# Altium PCB diff_demo.PcbDoc
Units mm, origin at the board's own origin, x right, y up, seen from the top; angles counter-clockwise.
Board outline 152.4 x 101.6 mm, 4 copper layers (Top Layer, PWR, GND, Bottom Layer); 7 components, 8 nets, 41 pads, 2 vias.
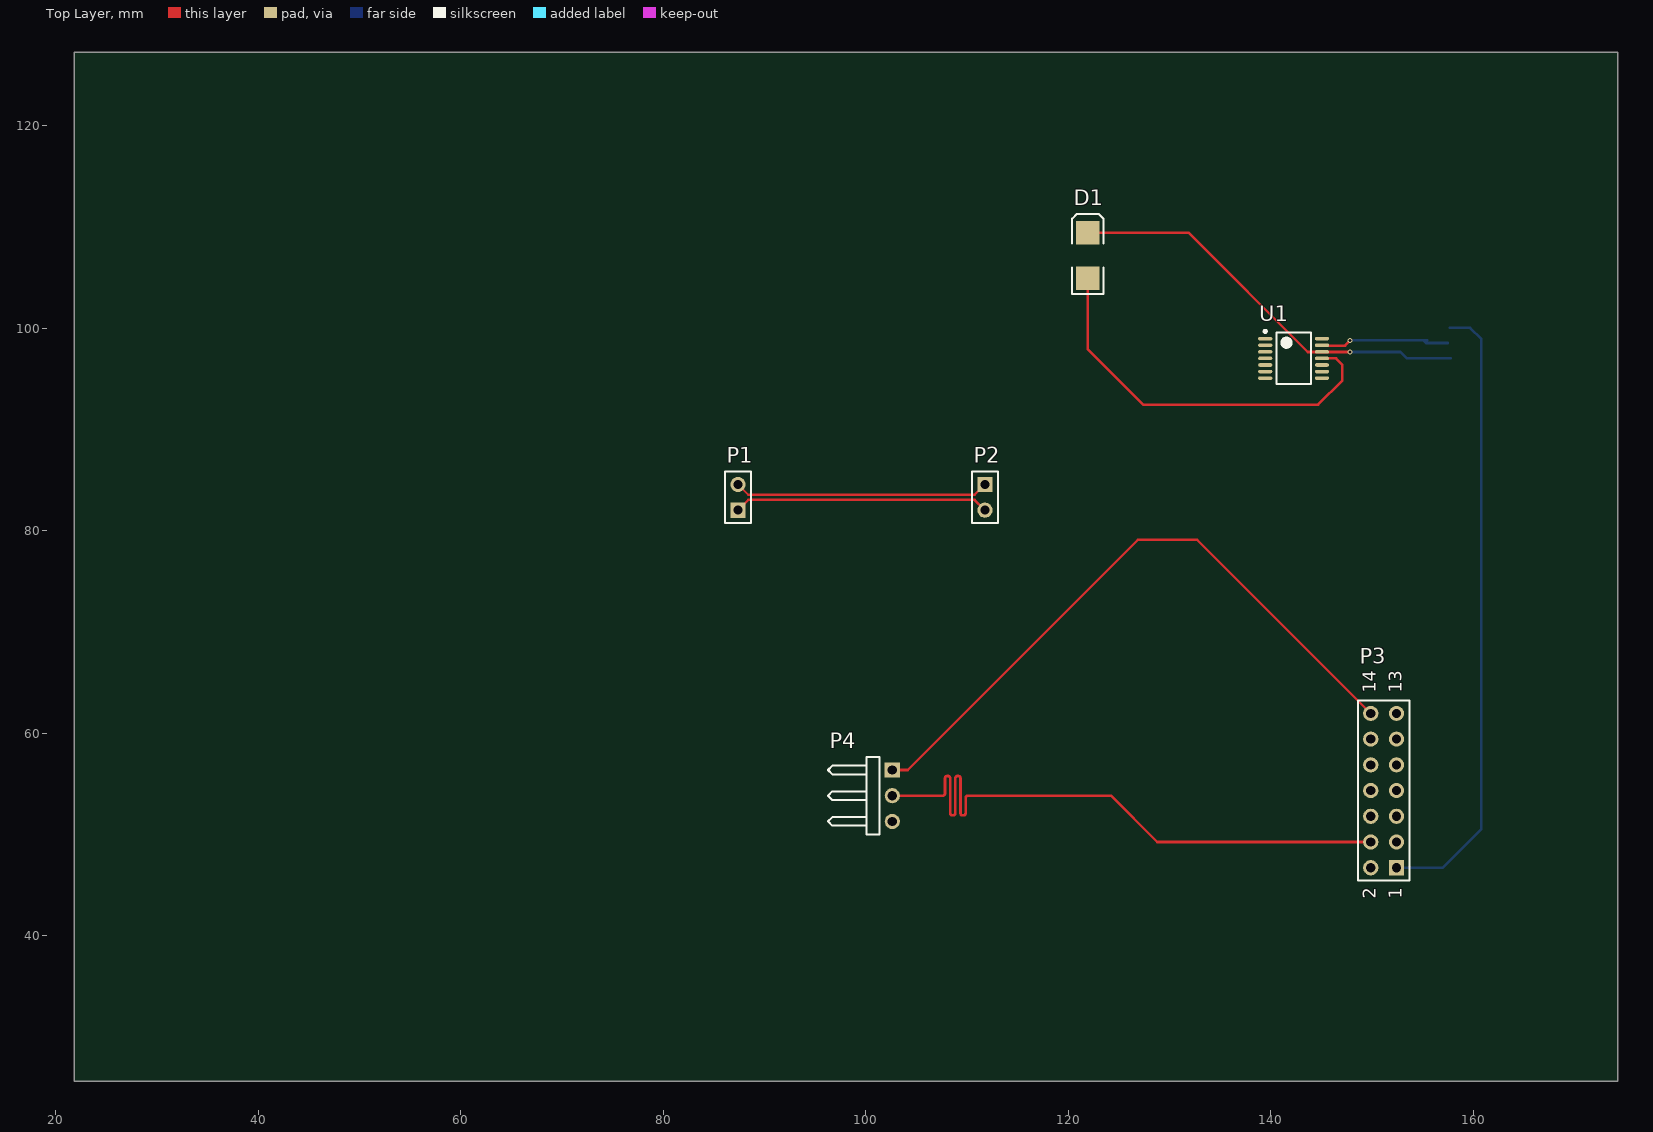
[diagram p0: Top Layer view]
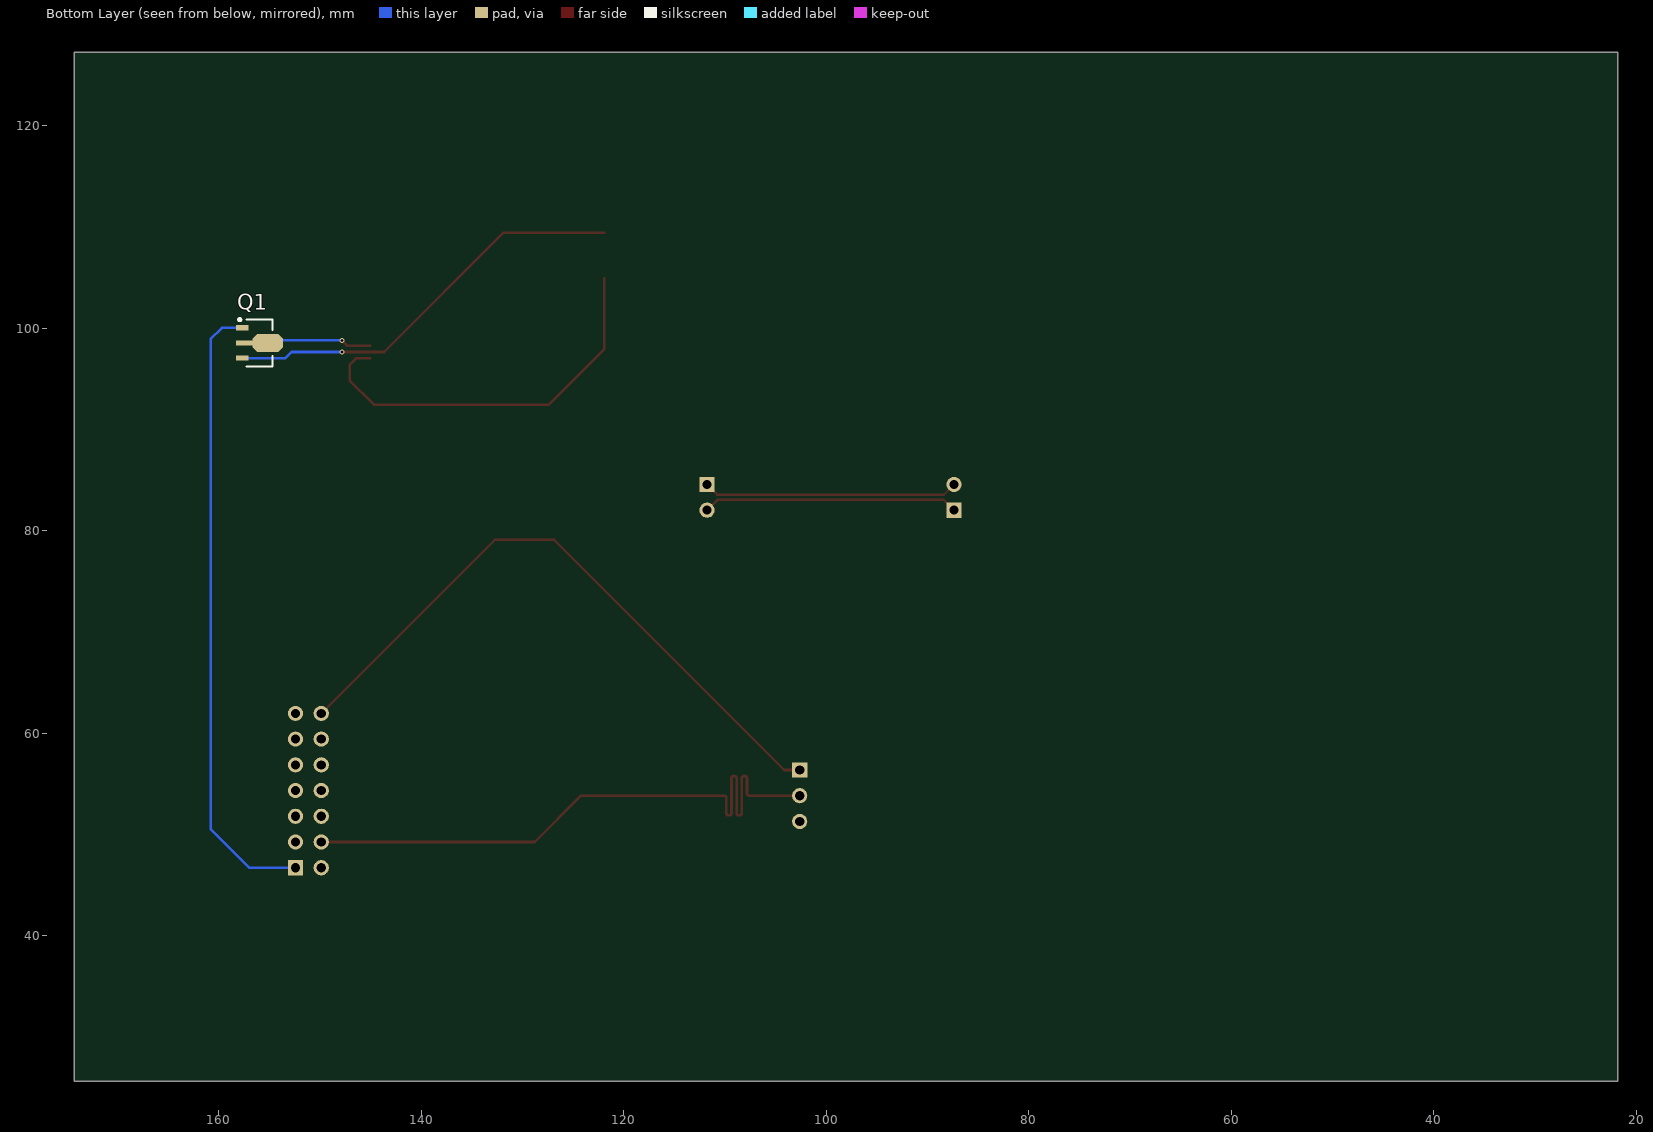
[diagram p1: Bottom Layer view, seen from below]
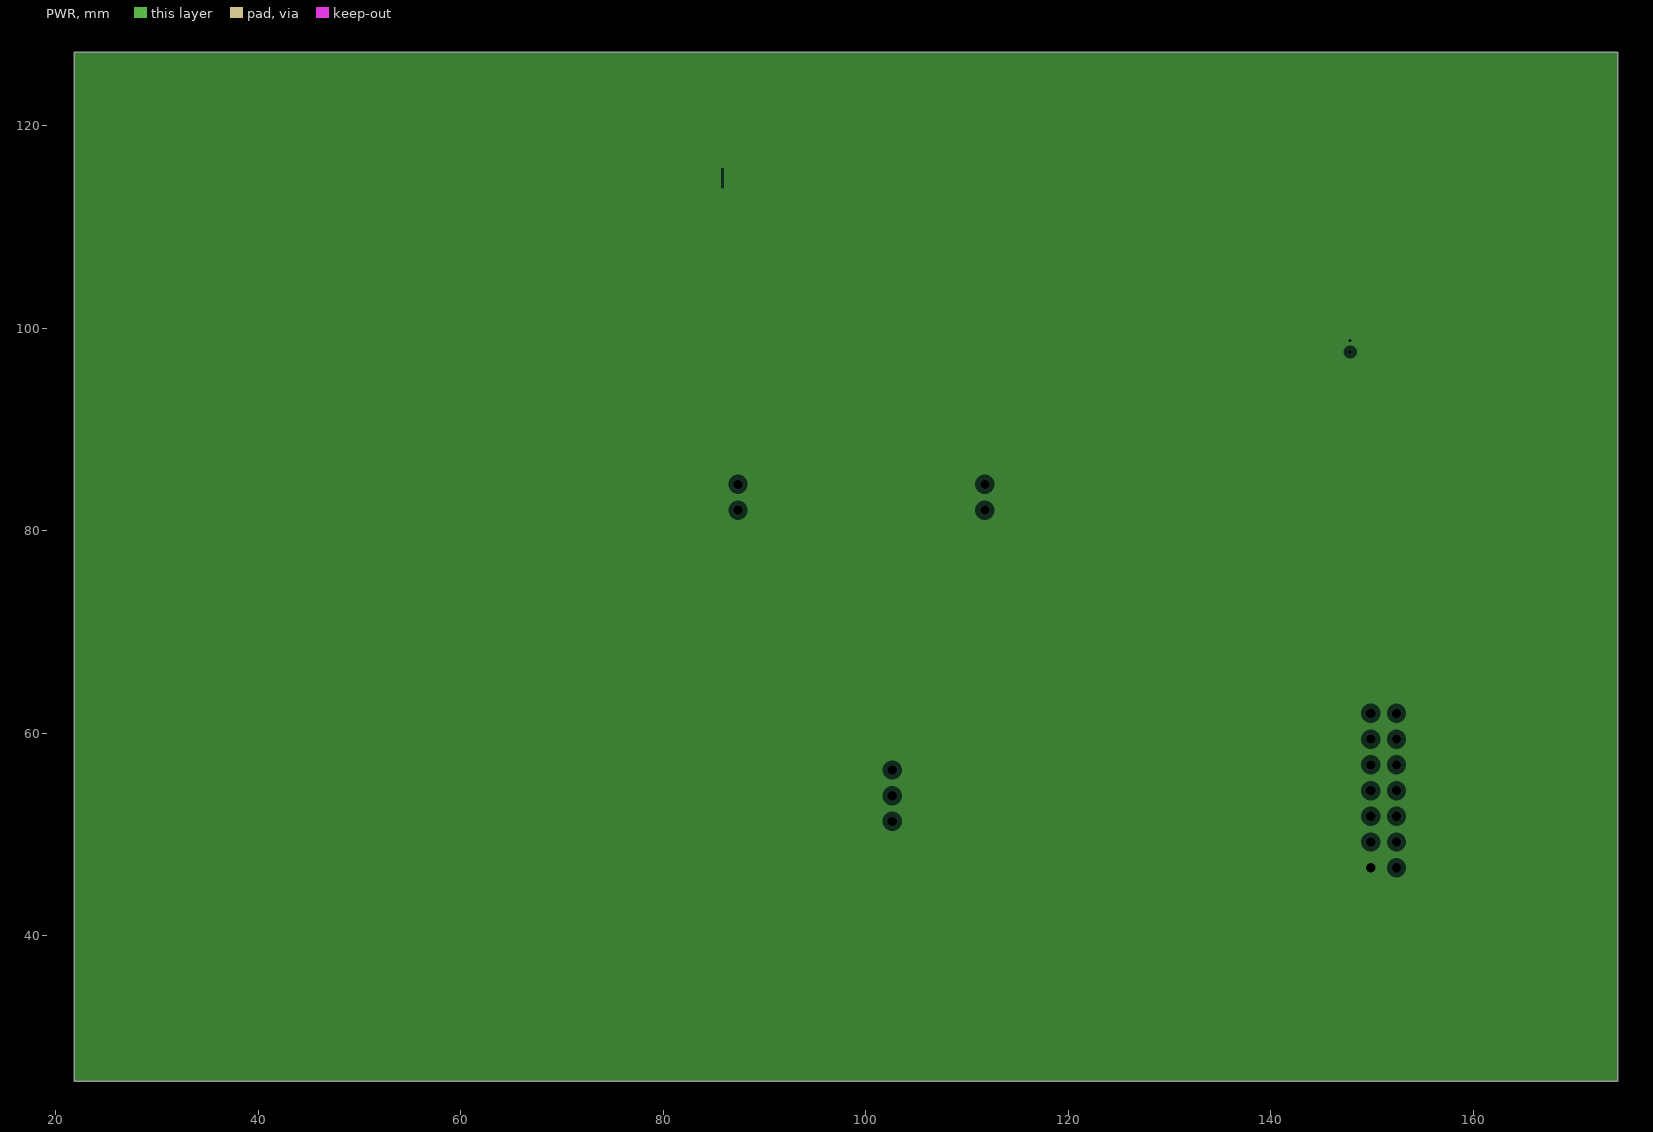
[diagram p2: PWR, clearances drawn from the general rule]
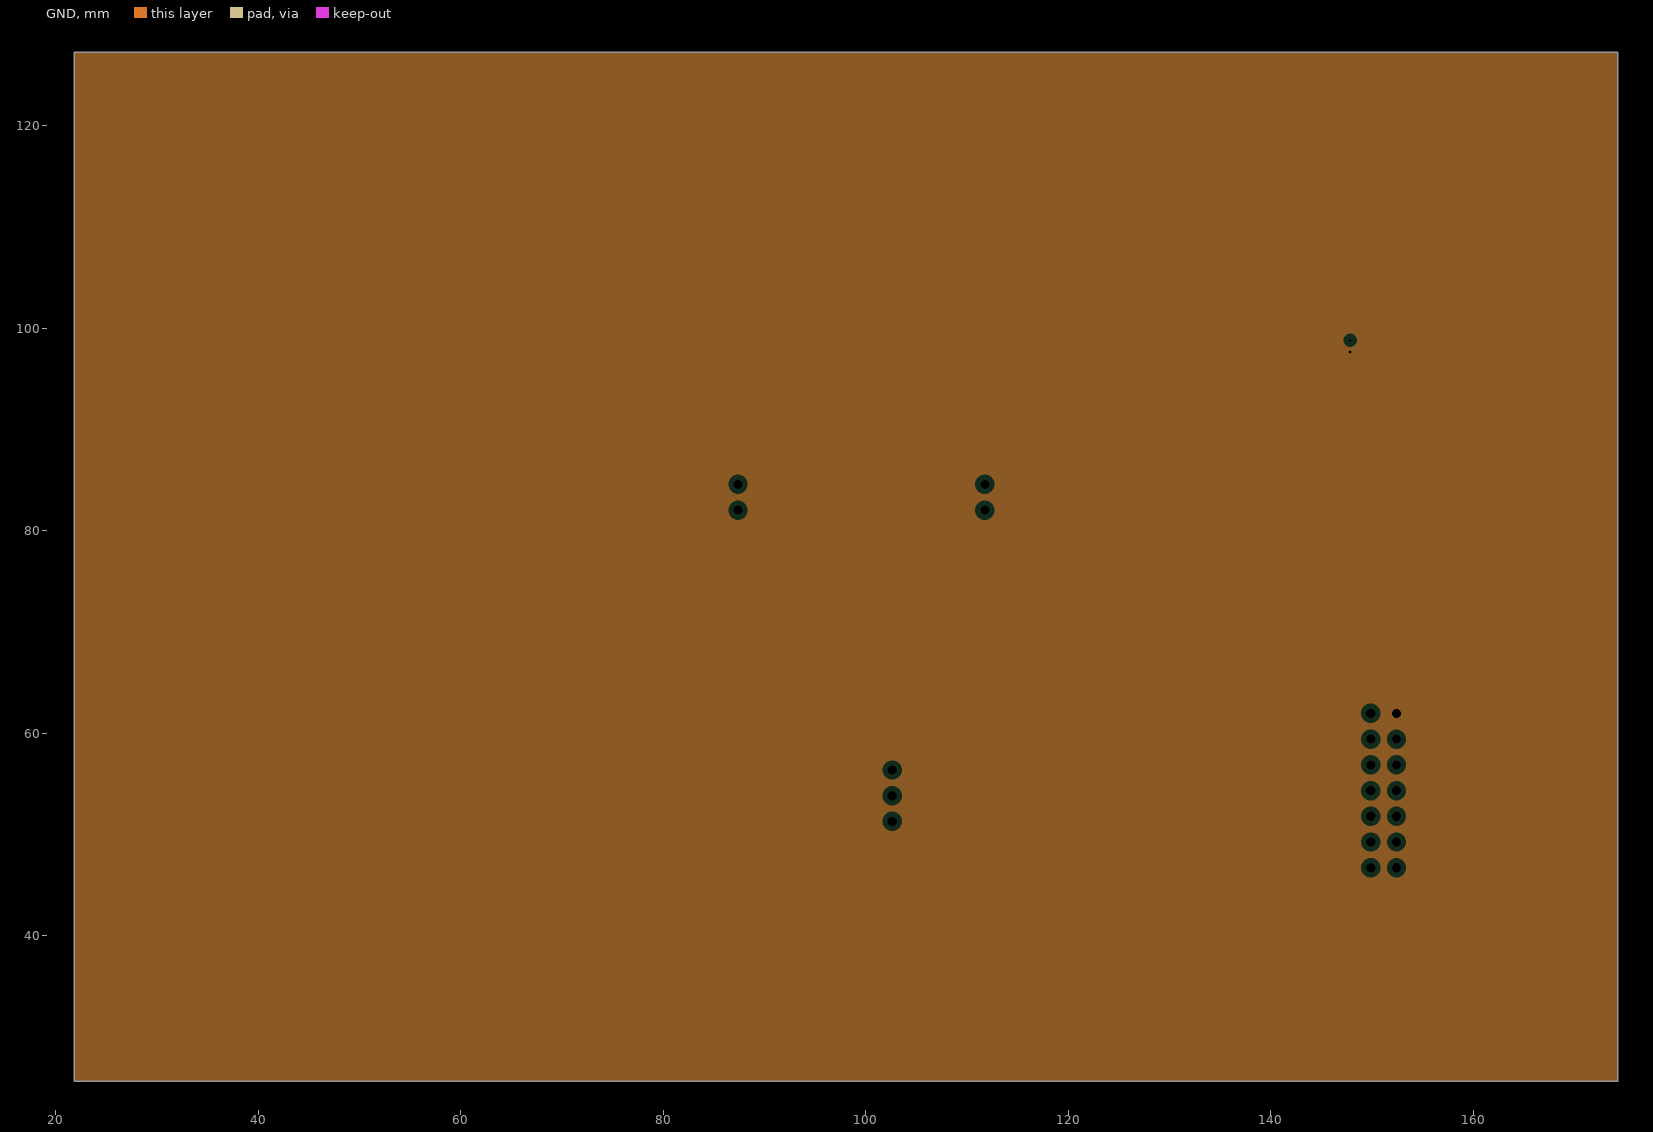
[diagram p3: GND, clearances drawn from the general rule]

## Layer stack, top to bottom
Top Layer: signal copper 0.035
Dielectric: prepreg 0.32, FR-4, Dk 4.8
PWR: plane copper 0.0356, net VCC
Dielectric: core 0.32, FR-4, Dk 4.8
GND: plane copper 0.0356, net GND
Dielectric: prepreg 0.32, FR-4, Dk 4.8
Bottom Layer: signal copper 0.035

## Board outline
21.844,25.654 174.244,25.654 174.244,127.254 21.844,127.254

## Design rules (kind name [scope] priority, off if disabled: settings)
Clearance Clearance_1 [All vs IsPad] p1: gap=0.203
Clearance [All] p2: gap=0.254
ComponentClearance [All] p1: gap=0.254 collisioncheckmode=3 verticalgap=0.254
DiffPairsRouting [All] p1: maxlimit=0.254 minlimit=0.254 mostfreqgap=0.254 maxuncoupledlength=12.7
Length ADDR [InNetClass('ADDR')] p1: maxlimit=63.762 minlimit=63.737
PlaneClearance [All] p1: clearance=0.508
PlaneConnect [All] p1: planeconnectstyle=Relief reliefexpansion=0.508 reliefentries=4 reliefconductorwidth=0.254 reliefairgap=0.254
PolygonConnect [All] p1: connectstyle=Relief reliefconductorwidth=0.254 reliefentries=4 polygonreliefangle="90 Angle"
RoutingVias [All] p1: holewidth=0.3 width=0.5 viastyle="Through Hole" minholewidth=0.2 minwidth=0.4 maxholewidth=0.711 maxwidth=1.27
SolderMaskExpansion [All] p1: expansion=0.102
TestPointUsage [All] p1: valid=0 allowmultiple=FALSE
Testpoint [All] p1: side=15 testpointundercomponent=TRUE minsize=1.016 maxsize=2.54 preferedsize=1.524 minholesize=0 maxholesize=1.016 preferedholesize=0.813 testpointgrid=0.025 style=1023 order=0-112345678
Width [All] p1: maxlimit=0.254 minlimit=0.254 preferedwidth=0.254
15 further rules are at their usual default settings.

## Classes and differential pairs
differential pair GIFT: +GIFT_P -GIFT_N

## Components (designator, comment, footprint, x,y, rotation, side; value= is the part's Value field where it differs from the comment)
D1 "D Schottky" SMB 121.92,107.188 r90 top
P1 "Header 2" HDR1X2 87.376,82.042 r90 top
P2 "Header 2" HDR1X2 111.76,84.582 r270 top
P3 "Header 7X2" HDR2X7 152.4,46.736 r90 top
P4 "Header 3H" HDR1X3H 102.616,56.388 r270 top
Q1 "Diac-PNP" SOT89L 155.956,98.552 r180 bottom
U1 "DAC-8" SOT402-1_L 142.24,97.028 r0 top

## Footprints (in the part's own frame and the unit in brackets; to place one, negate y for a bottom-side part, rotate by r counter-clockwise, add the part's x,y. Pads: shape width x height; smd on the part's side, far side on the other; paste and mask are expansions set on the pad)
HDR1X2 [mm] "Connector; Header; 2 Position"
  rect 1.5x1.5 hole 0.9: 1(0,0)
  round 1.5 hole 0.9: 2(2.54,0)
  silkscreen extent -1.27,-1.27 3.81,1.27
HDR1X3H [mm] "Connector; Header; 3 Position; Right Angle"
  rect 1.5x1.5 hole 0.9: 1(0,0)
  round 1.5 hole 0.9: 2(2.54,0) 3(5.08,0)
  silkscreen extent -1.27,-6.35 6.35,-1.27
HDR2X7 [mm] "Connector; Header; 7x2 Position"
  rect 1.5x1.5 hole 0.9: 1(0,0)
  round 1.5 hole 0.9: 2(0,2.54) 3(2.54,0) 4(2.54,2.54) 5(5.08,0) 6(5.08,2.54) 7(7.62,0) 8(7.62,2.54) 9(10.16,0) 10(10.16,2.54) 11(12.7,0) 12(12.7,2.54) 13(15.24,0) 14(15.24,2.54)
  silkscreen extent -1.27,-1.27 16.51,3.81
SMB [mm] "DO-214-AA/SMB; 2 C-Bend Leads; Body 5.3 x 3.6 mm, inc. leads (LxW)"
  rect 2.3x2.3 smd: 1(-2.25,0) 2(2.25,0)
  silkscreen extent -3.8,-1.55 4.1,1.55
SOT89L [mm] "SOT89, 3-Leads, Body 4.5x2.4 mm, Pitch 1.5mm, Lead Span 4.1mm, IPC High Density"
  rect 1.2x0.5 smd: 1(-1.7,1.5) 3(-1.7,-1.5)
  rect 1.6x0.5 smd: 2(-1.5,0)
  oct 3x1.8 smd: 2(0.8,0)
  silkscreen extent -2.08,-2.3 1.3,2.42, body extent -1.3,-2.3 1.3,2.3, height 1.6
SOT402-1_L [mm] "TSOP, 14-Leads, Body 5x4.4mm, Pitch 0.65mm, IPC High Density"
  oval 1.4x0.35 smd: 1(-2.8,1.95) 2(-2.8,1.3) 3(-2.8,0.65) 4(-2.8,0) 5(-2.8,-0.65) 6(-2.8,-1.3) 7(-2.8,-1.95) 8(2.8,-1.95) 9(2.8,-1.3) 10(2.8,-0.65) 11(2.8,0) 12(2.8,0.65) 13(2.8,1.3) 14(2.8,1.95)
  silkscreen extent -2.92,-2.55 1.7,2.8, body extent -2.25,-2.55 2.25,2.55, height 1.1

## Part data
D1: "Schottky Diode"
P1 P2: "Header, 2-Pin"
P3: "Header, 7-Pin, Dual row"
P4: "Header, 3-Pin, Right Angle"
Q1: "DIAC"
U1: "Generic 8-Bit D/A Converter"

## Via types
v1: diameter 0.5, hole 0.3, Top Layer to Bottom Layer, 2 vias

## Nets (pads, with @x,y where several pads share a name; then routed paths per layer and width w, separated by ;. In a path a pad name is that pad's centre, name@x,y a point inside that pad or via, vN(x,y) a via of type N, cw(c..) or ccw(c..) an arc to the next point about the centre after c; other vN are vias at no path point)
GIFT_N: P1.2 P2.1 | length 25.2
  Top Layer w0.254: P1.2 88.392,83.566 108.055,83.566 110.744,83.566 P2.1
GIFT_P: P1.1 P2.2 | length 25.2
  Top Layer w0.254: P1.1 88.392,83.058 108.055,83.058 110.744,83.058 P2.2
GND: D1.2 P3.13 Q1.3 U1.12 | length 41
  Top Layer w0.254: D1.2 131.862,109.438 143.637,97.663 v1(147.828,97.663)
  Bottom Layer w0.254: v1(147.828,97.663) 152.781,97.663 153.416,97.028 Q1.3@157.734,97.028
NetD1_1: D1.1 U1.11 | length 39.2
  Top Layer w0.254: D1.1 121.92,97.917 127.381,92.456 144.653,92.456 147.066,94.869 147.066,96.393 146.431,97.028 U1.11
NetP3_1: P3.1 Q1.1 | length 61.9
  Bottom Layer w0.254: P3.1 156.972,46.736 160.782,50.546 160.782,98.933 159.663,100.052 Q1.1
S_A: P3.14 P4.1 | length 63.8
  Top Layer w0.254: P4.1 104.14,56.388 126.873,79.121 132.715,79.121 P3.14
S_B: P3.4 P4.2 | length 63.7
  Top Layer w0.254: P4.2 107.594,53.848 ccw(c107.594,54.077) 107.823,54.077 107.823,55.568 cw(c108.052,55.568) 108.052,55.797 108.102,55.797 cw(c108.102,55.568) 108.331,55.568 108.331,52.128 ccw(c108.56,52.128) 108.56,51.899 108.61,51.899 ccw(c108.61,52.128) 108.839,52.128 108.839,55.568 cw(c109.068,55.568) 109.068,55.797 109.118,55.797 cw(c109.118,55.568) 109.347,55.568 109.347,52.128 ccw(c109.576,52.128) 109.576,51.899 109.626,51.899 ccw(c109.626,52.128) 109.855,52.128 109.855,53.619 cw(c110.084,53.619) 110.084,53.848 124.206,53.848 128.778,49.276 P3.4
VCC: P3.2 Q1.2 U1.13 | length 13.1
  Top Layer w0.254: U1.13@145.034,98.298 147.32,98.298 v1(147.828,98.806)
  Bottom Layer w0.254: v1(147.828,98.806) Q1.2@155.448,98.806 ; Q1.2@155.067,98.806 155.321,98.552 Q1.2@157.456,98.552
pads on no net: P3.3 P3.5 P3.6 P3.7 P3.8 P3.9 P3.10 P3.11 P3.12 P4.3 U1.1 U1.2 U1.3 U1.4 U1.5 U1.6 U1.7 U1.8 U1.9 U1.10 U1.14

## Polygon pours and split planes (outlines as drawn)
VCC on PWR (split plane): 174.244,25.654 21.844,25.654 21.844,127.254 174.244,127.254
GND on GND (split plane): 174.244,25.654 21.844,25.654 21.844,127.254 174.244,127.254

## Other copper
PWR (plane layer: these items are gaps in the copper):
  lines w0.254: 85.852,113.919 85.852,115.697

## Text inside footprints (layer, text, board x,y; h text height)
P3: Top Overlay "2" at 150.368,43.688 h1.27 r90; Top Overlay "1" at 152.908,43.688 h1.27 r90; Top Overlay "14" at 150.368,64.008 h1.27 r90; Top Overlay "13" at 152.908,64.008 h1.27 r90